# Altium PCB TSAL_Ligth_2018-2019_v2.PcbDoc
Units mm, origin at the board's own origin, x right, y up, seen from the top; angles counter-clockwise.
Board outline 45 x 20 mm, 2 copper layers (Top Layer, Bottom Layer); 17 components, 13 nets, 31 pads, 16 vias.
Unrouted connection lines stored in the file: 1.
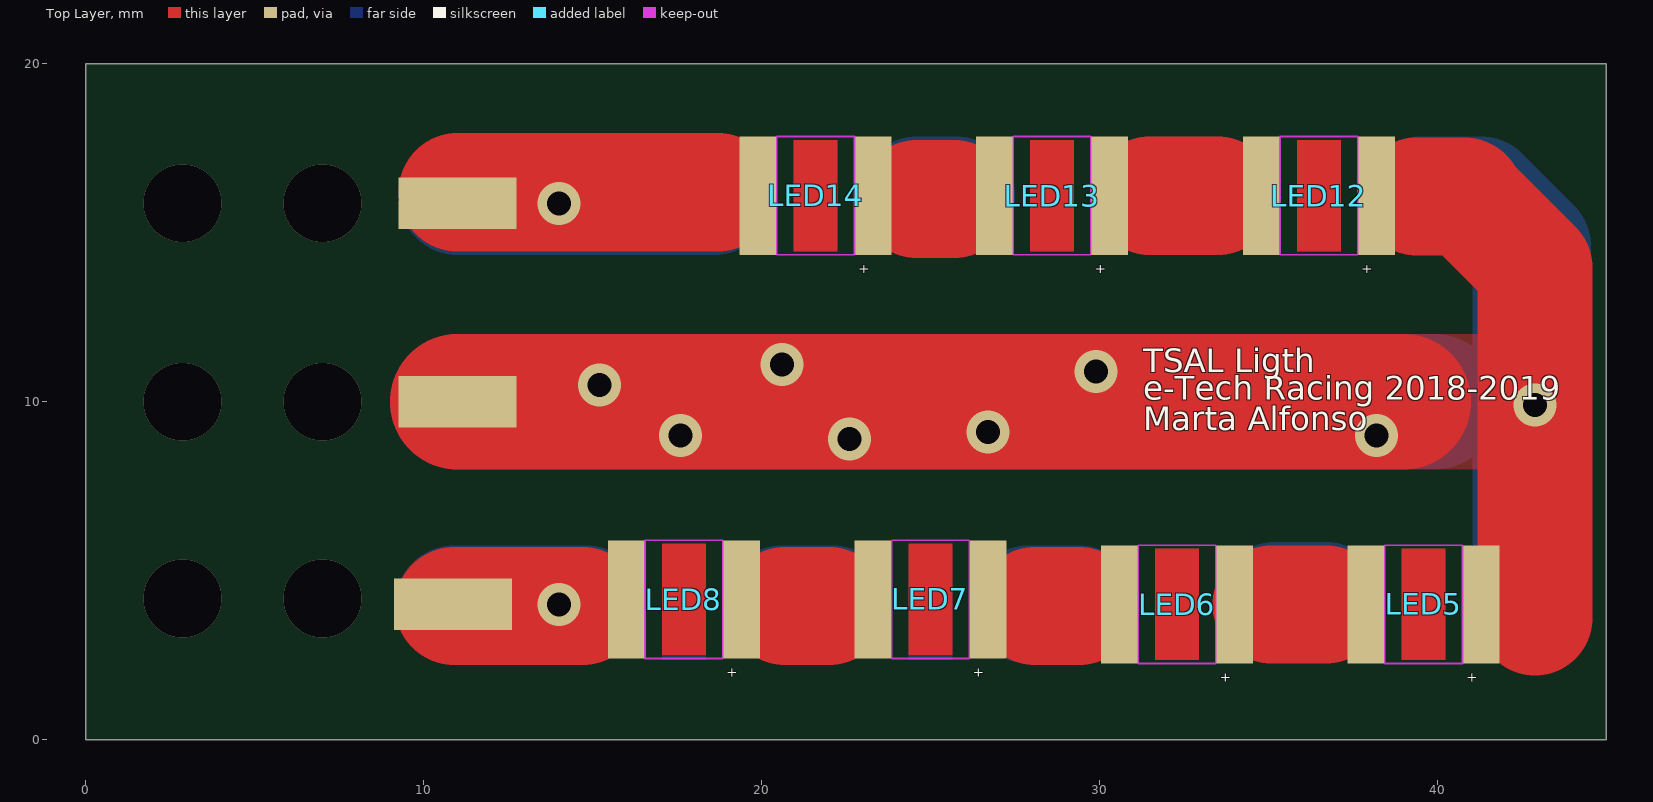
[diagram p0: Top Layer view]
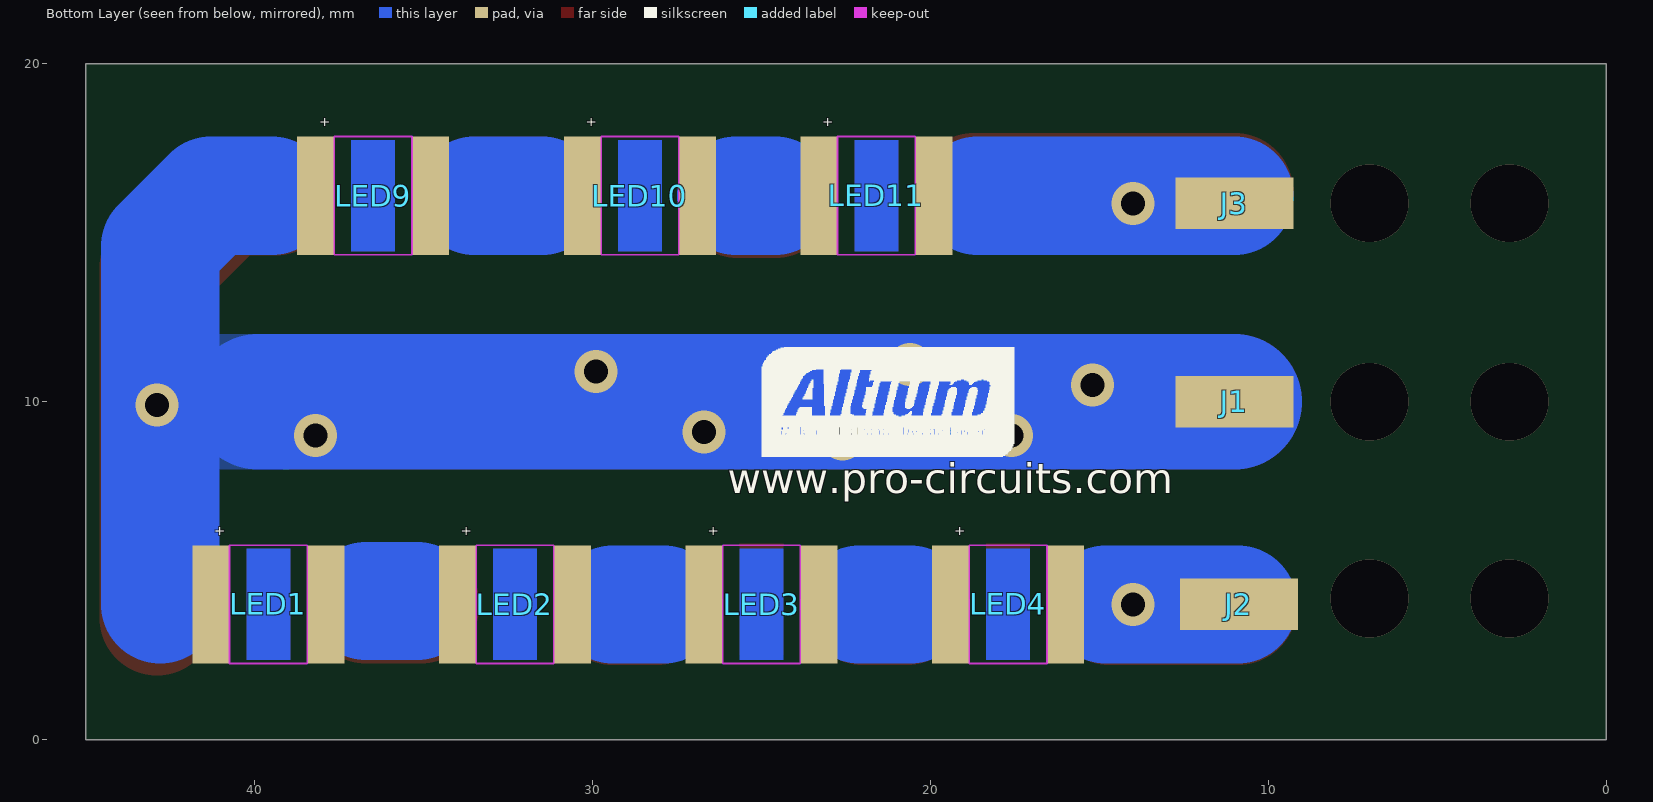
[diagram p1: Bottom Layer view, seen from below]
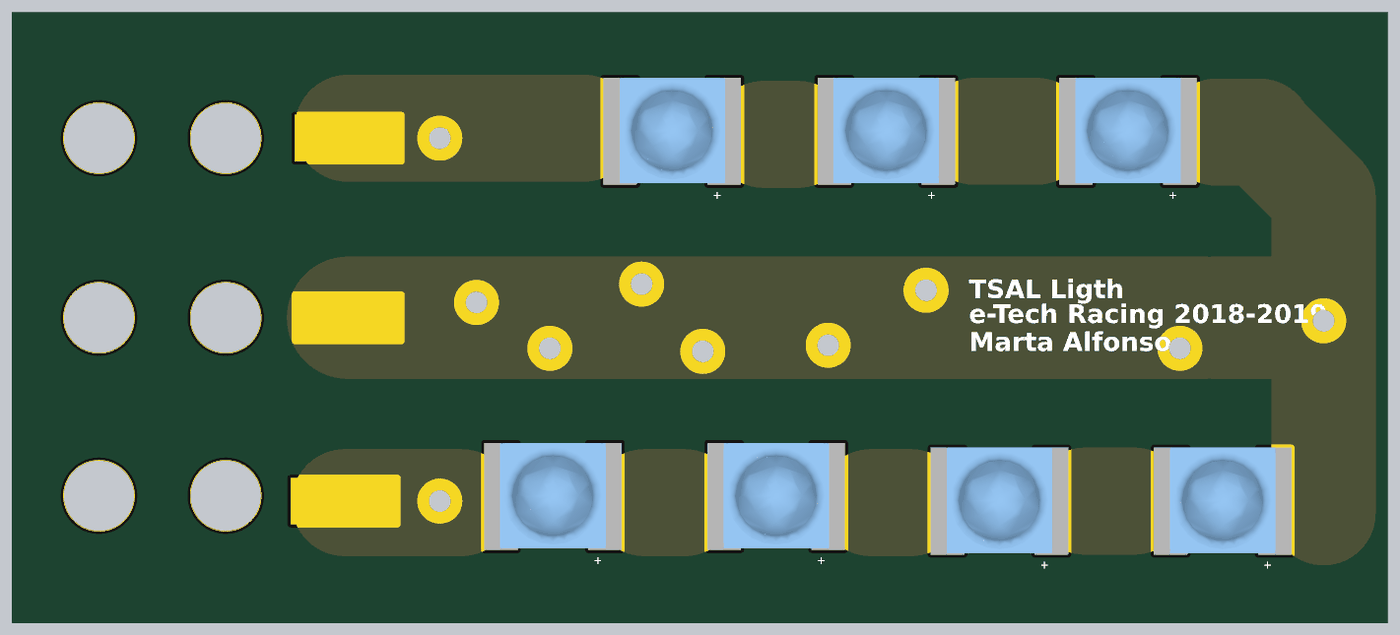
[diagram p2: 3D render of the assembled board from above, using the file's embedded part models]
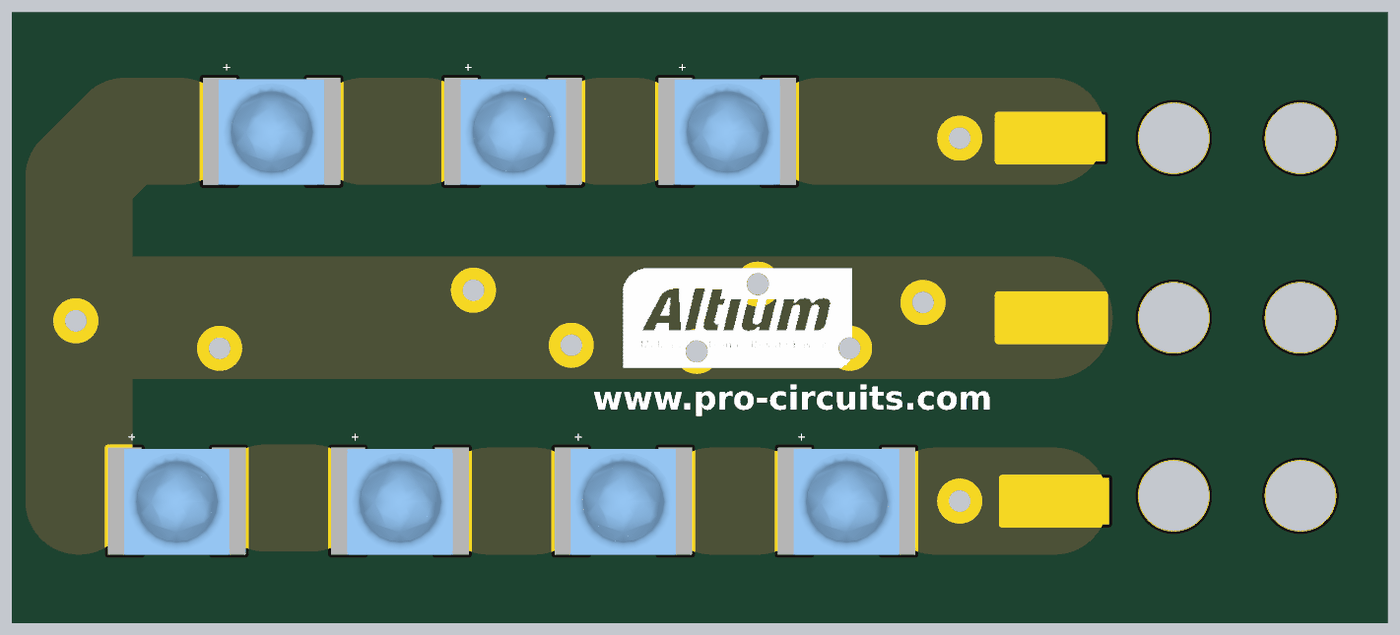
[diagram p3: 3D render of the assembled board from below, using the file's embedded part models]

## Layer stack, top to bottom
Top Solder: solder mask 0.0102, Solder Resist, Dk 3.5
Top Layer: signal copper 0.0356
Dielectric 1: dielectric 0.32, FR-4, Dk 4.8
Bottom Layer: signal copper 0.0356
Bottom Solder: solder mask 0.0102, Solder Resist, Dk 3.5

## Board outline
0,0 45,0 45,20 0,20

## Design rules (kind name [scope] priority, off if disabled: settings)
Clearance [All] p1: gap=0.254 ignorepadtopadclearanceinfootprint=FALSE except(0: Arc-Hole Track-Hole SMDPad-Hole THPad-Hole Via-Hole Fill-Hole Poly-Hole Region-Hole Text-Hole)
ComponentClearance [All] p1: gap=0.254 collisioncheckmode=3 verticalgap=0.1 showdistances=FALSE
PolygonConnect [All] p1: connectstyle=Relief reliefconductorwidth=0.254 reliefentries=4 polygonreliefangle="90 Angle" airgapwidth=0.254
RoutingVias [All] p1: holewidth=0.711 width=1.27 viastyle="Through Hole" minholewidth=0.711 minwidth=1.27 maxholewidth=3 maxwidth=3
SolderMaskExpansion [All] p1: expansion=0.102
UnpouredPolygon [All] p1: allowunpoured=TRUE
Width [All] p1: maxlimit=4 minlimit=0.254 preferedwidth=3.5 minimp=50.000000 maximp=50.000000 favimp=50.000000
28 further rules are at their usual default settings.

## Components (designator, comment, footprint, x,y, rotation, side; value= is the part's Value field where it differs from the comment)
J1 "Pad" Pad 11,10 r0 bottom
J2 "Pad" Pad 10.868,4 r0 bottom
J3 "Pad" Pad 11,15.875 r0 bottom
LED1 "150353RS74500" 150353RS74500 39.6,2.35 r180 bottom
LED2 "150353RS74500" 150353RS74500 32.3,2.35 r180 bottom
LED3 "150353RS74500" 150353RS74500 25,2.35 r180 bottom
LED4 "150353RS74500" 150353RS74500 17.7,2.35 r180 bottom
LED5 "150353RS74500" 150353RS74500 39.6,5.65 r180 top
LED6 "150353RS74500" 150353RS74500 32.3,5.65 r180 top
LED7 "150353RS74500" 150353RS74500 25,5.8 r180 top
LED8 "150353RS74500" 150353RS74500 17.7,5.8 r180 top
LED9 "150353GS74500" 150353RS74500 36.5,14.45 r180 bottom
LED10 "150353GS74500" 150353RS74500 28.6,14.45 r180 bottom
LED11 "150353GS74500" 150353RS74500 21.6,14.45 r180 bottom
LED12 "150353GS74500" 150353RS74500 36.5,17.75 r180 top
LED13 "150353GS74500" 150353RS74500 28.6,17.75 r180 top
LED14 "150353GS74500" 150353RS74500 21.6,17.75 r180 top

## Footprints (in the part's own frame and the unit in brackets; to place one, negate y for a bottom-side part, rotate by r counter-clockwise, add the part's x,y. Pads: shape width x height; smd on the part's side, far side on the other; paste and mask are expansions set on the pad)
150353RS74500 [mm]
  rect 1.1x3.5 smd: 1(-1.7,1.65) 2(1.7,1.65)
  Top Layer region: -0.65,3.3 0.65,3.3 0.65,0 -0.65,0
  Top Layer keep-out lines w0.05: 1.15,-0.1 1.15,3.4 -1.15,3.4 -1.15,-0.1 1.15,-0.1
  body extent -1.73,-0.1 1.72,3.35, height 2.01
Pad [mm]
  rect 3.5x1.524 all layers, no hole: 1(0,0)

## Part data
LED9 LED10 LED11 LED12 LED13 LED14: library part 150353RS74500

## Via types
v1: diameter 1.27, hole 0.711, Top Layer to Bottom Layer, 10 vias
v2: diameter 2.3, hole 2.3, Top Layer to Bottom Layer, 6 vias

## Nets (pads, with @x,y where several pads share a name; then routed paths per layer and width w, separated by ;. In a path a pad name is that pad's centre, name@x,y a point inside that pad or via, vN(x,y) a via of type N, cw(c..) or ccw(c..) an arc to the next point about the centre after c; other vN are vias at no path point)
+12: J1.1 LED1.1 LED5.1 LED9.1 LED12.1 | length 86.2
  Top Layer w3.4: 40.8,16.075 42.9,13.975 v1(42.9,9.9) 42.9,3.6
  Top Layer w3.5: 39.4,16.075 40.8,16.075
  Top Layer w4: J1.1 39,10
  Bottom Layer w3.5: 39.5,16.1 41.3,16.1 42.1,15.3 42.8,14.6 42.8,4
  Bottom Layer w4: J1.1 39.9,10
  other v1: 22.6,8.9 17.6,9 38.2,9 26.7,9.1 15.2,10.5 29.9,10.9 20.6,11.1
Alta: J2.1 LED4.2 LED8.2 | length 7.7
  Top Layer w3.5: J2.1@10.9,3.95 14.7,3.95
  Bottom Layer w3.5: J2.1@10.9,4 11.818,4 v1(14,4) 14.8,4
Baixa: J3.1 LED11.2 LED14.2 | length 15.3
  Top Layer w3.5: J3.1@11,16.2 18.7,16.2
  Bottom Layer w3.5: J3.1@11,16.1 18.6,16.1
  other v1: 14,15.875
NetLED1_2: LED1.2 LED2.1 | length 1.5
  Bottom Layer w3.5: 35.2,4.1 36.7,4.1
NetLED2_2: LED2.2 LED3.1 | length 1.5
  Bottom Layer w3.5: 27.9,4 29.4,4
NetLED3_2: LED3.2 LED4.1 | length 1.5
  Bottom Layer w3.5: 20.6,4 22.1,4
NetLED5_2: LED5.2 LED6.1 | length 1.6
  Top Layer w3.5: 35.1,4 36.7,4
NetLED6_2: LED6.2 LED7.1 | length 1.3
  Top Layer w3.5: 28.1,3.95 29.4,3.95
NetLED7_2: LED7.2 LED8.1 | length 1.3
  Top Layer w3.5: 20.7,3.95 22,3.95
NetLED9_2: LED9.2 LED10.1 | length 2
  Bottom Layer w3.5: 31.5,16.1 33.5,16.1
NetLED10_2: LED10.2 LED11.1 | length 1.2
  Bottom Layer w3.5: 24.6,16.1 25.75,16.1
NetLED12_2: LED12.2 LED13.1 | length 2
  Top Layer w3.5: 31.5,16.1 33.5,16.1
NetLED13_2: LED13.2 LED14.1 | length 1.1
  Top Layer w3.5: 24.6,16 25.7,16
copper on no net:
  other v2: 2.856,4.175 7,4.175 2.856,10 7,10 2.856,15.875 7,15.875

## Polygon pours and split planes (outlines as drawn)
+12 on Top Layer "GND plane Bottom" (solid, pour order 8): 39.2,12 39.2,8 41.3,8 41.4,8.1 41.4,12
no net on Top Layer "Top Layer-No Net" (solid, pour order 2): 30.751,15.875
+12 on Bottom Layer "GND plane Bottom" (solid, pour order 10): 39,12 39,8 41.1,8 41.2,7.9 41.2,12

## Other copper
Top Layer:
  region: 11.85,15 12.5,15 12.1,15
  region: 21.75,17

## Silkscreen, mask and mechanical layers (free items; w line width, h text height)
Top Overlay:
  text "TSAL Ligth" at 31.3,10.642 h1.2
  text "e-Tech Racing 2018-2019" at 31.3,9.829 h1.2
  text "Marta Alfonso" at 31.3,8.914 h1.2
Bottom Overlay:
  drawing of 714 lines, arcs and shapes, not listed
  text "www.pro-circuits.com" at 26,7 h1.52

## Text inside footprints (layer, text, board x,y; h text height)
LED1: Bottom Overlay "+" at 41.2,5.95 h0.5
LED2: Bottom Overlay "+" at 33.9,5.95 h0.5
LED3: Bottom Overlay "+" at 26.6,5.95 h0.5
LED4: Bottom Overlay "+" at 19.3,5.95 h0.5
LED5: Top Overlay "+" at 41.2,2.05 h0.5 r180
LED6: Top Overlay "+" at 33.9,2.05 h0.5 r180
LED7: Top Overlay "+" at 26.6,2.2 h0.5 r180
LED8: Top Overlay "+" at 19.3,2.2 h0.5 r180
LED9: Bottom Overlay "+" at 38.1,18.05 h0.5
LED10: Bottom Overlay "+" at 30.2,18.05 h0.5
LED11: Bottom Overlay "+" at 23.2,18.05 h0.5
LED12: Top Overlay "+" at 38.1,14.15 h0.5 r180
LED13: Top Overlay "+" at 30.2,14.15 h0.5 r180
LED14: Top Overlay "+" at 23.2,14.15 h0.5 r180